# Altium PCB NucciL.PcbDoc
Units mm, origin at the board's own origin, x right, y up, seen from the top; angles counter-clockwise.
Board outline 54 x 54 mm, 2 copper layers (Top Layer, Bottom Layer), stack 1.571 mm thick; 31 components, 23 nets, 79 pads, 10 vias.
Unrouted connection lines stored in the file: 12.
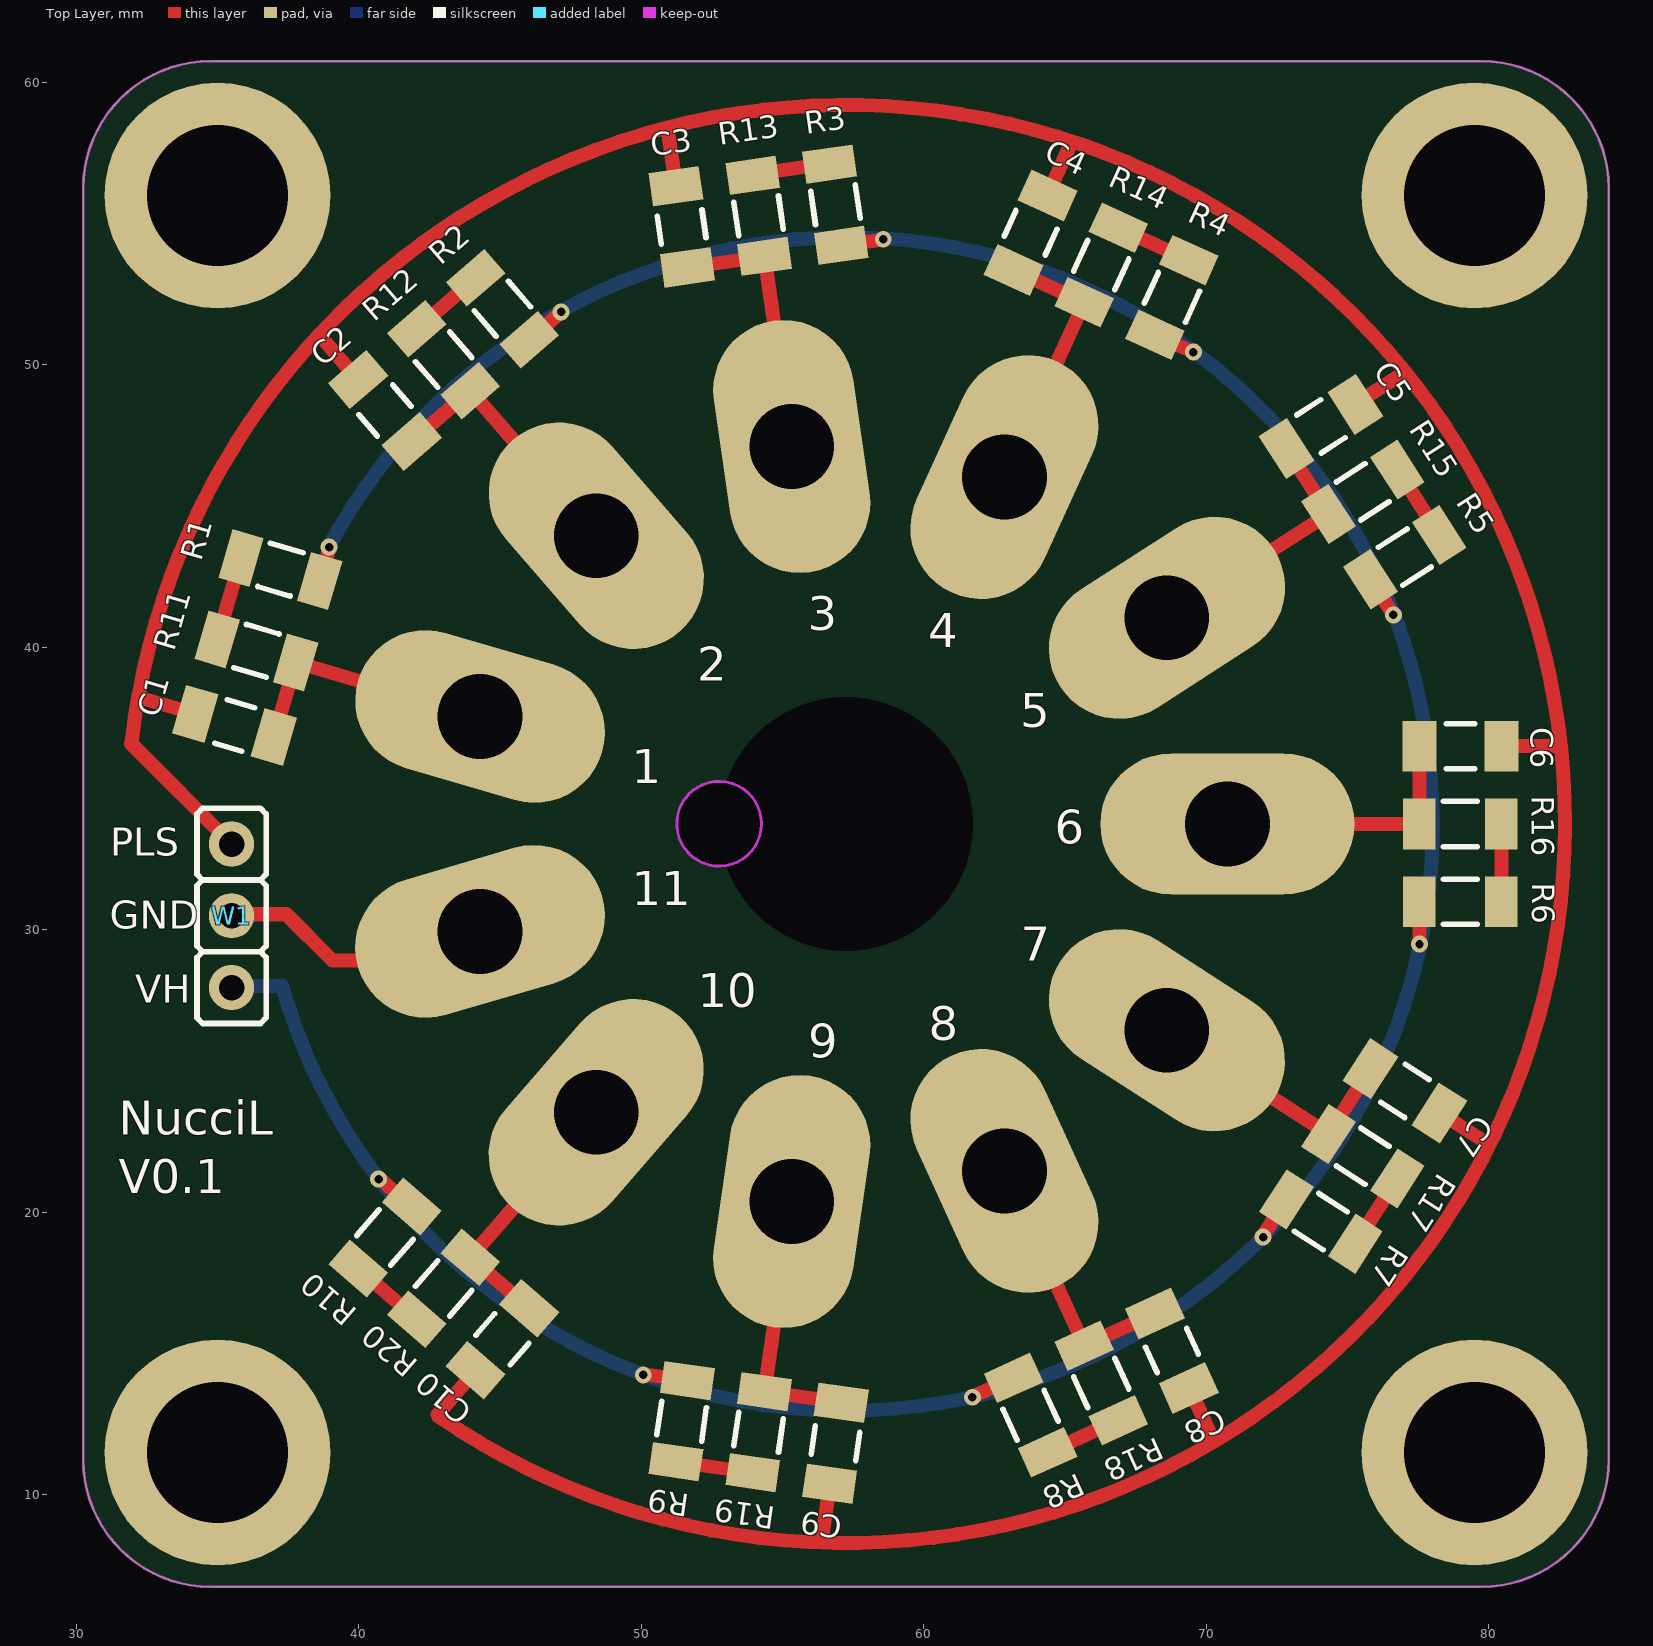
[diagram p0: Top Layer view]
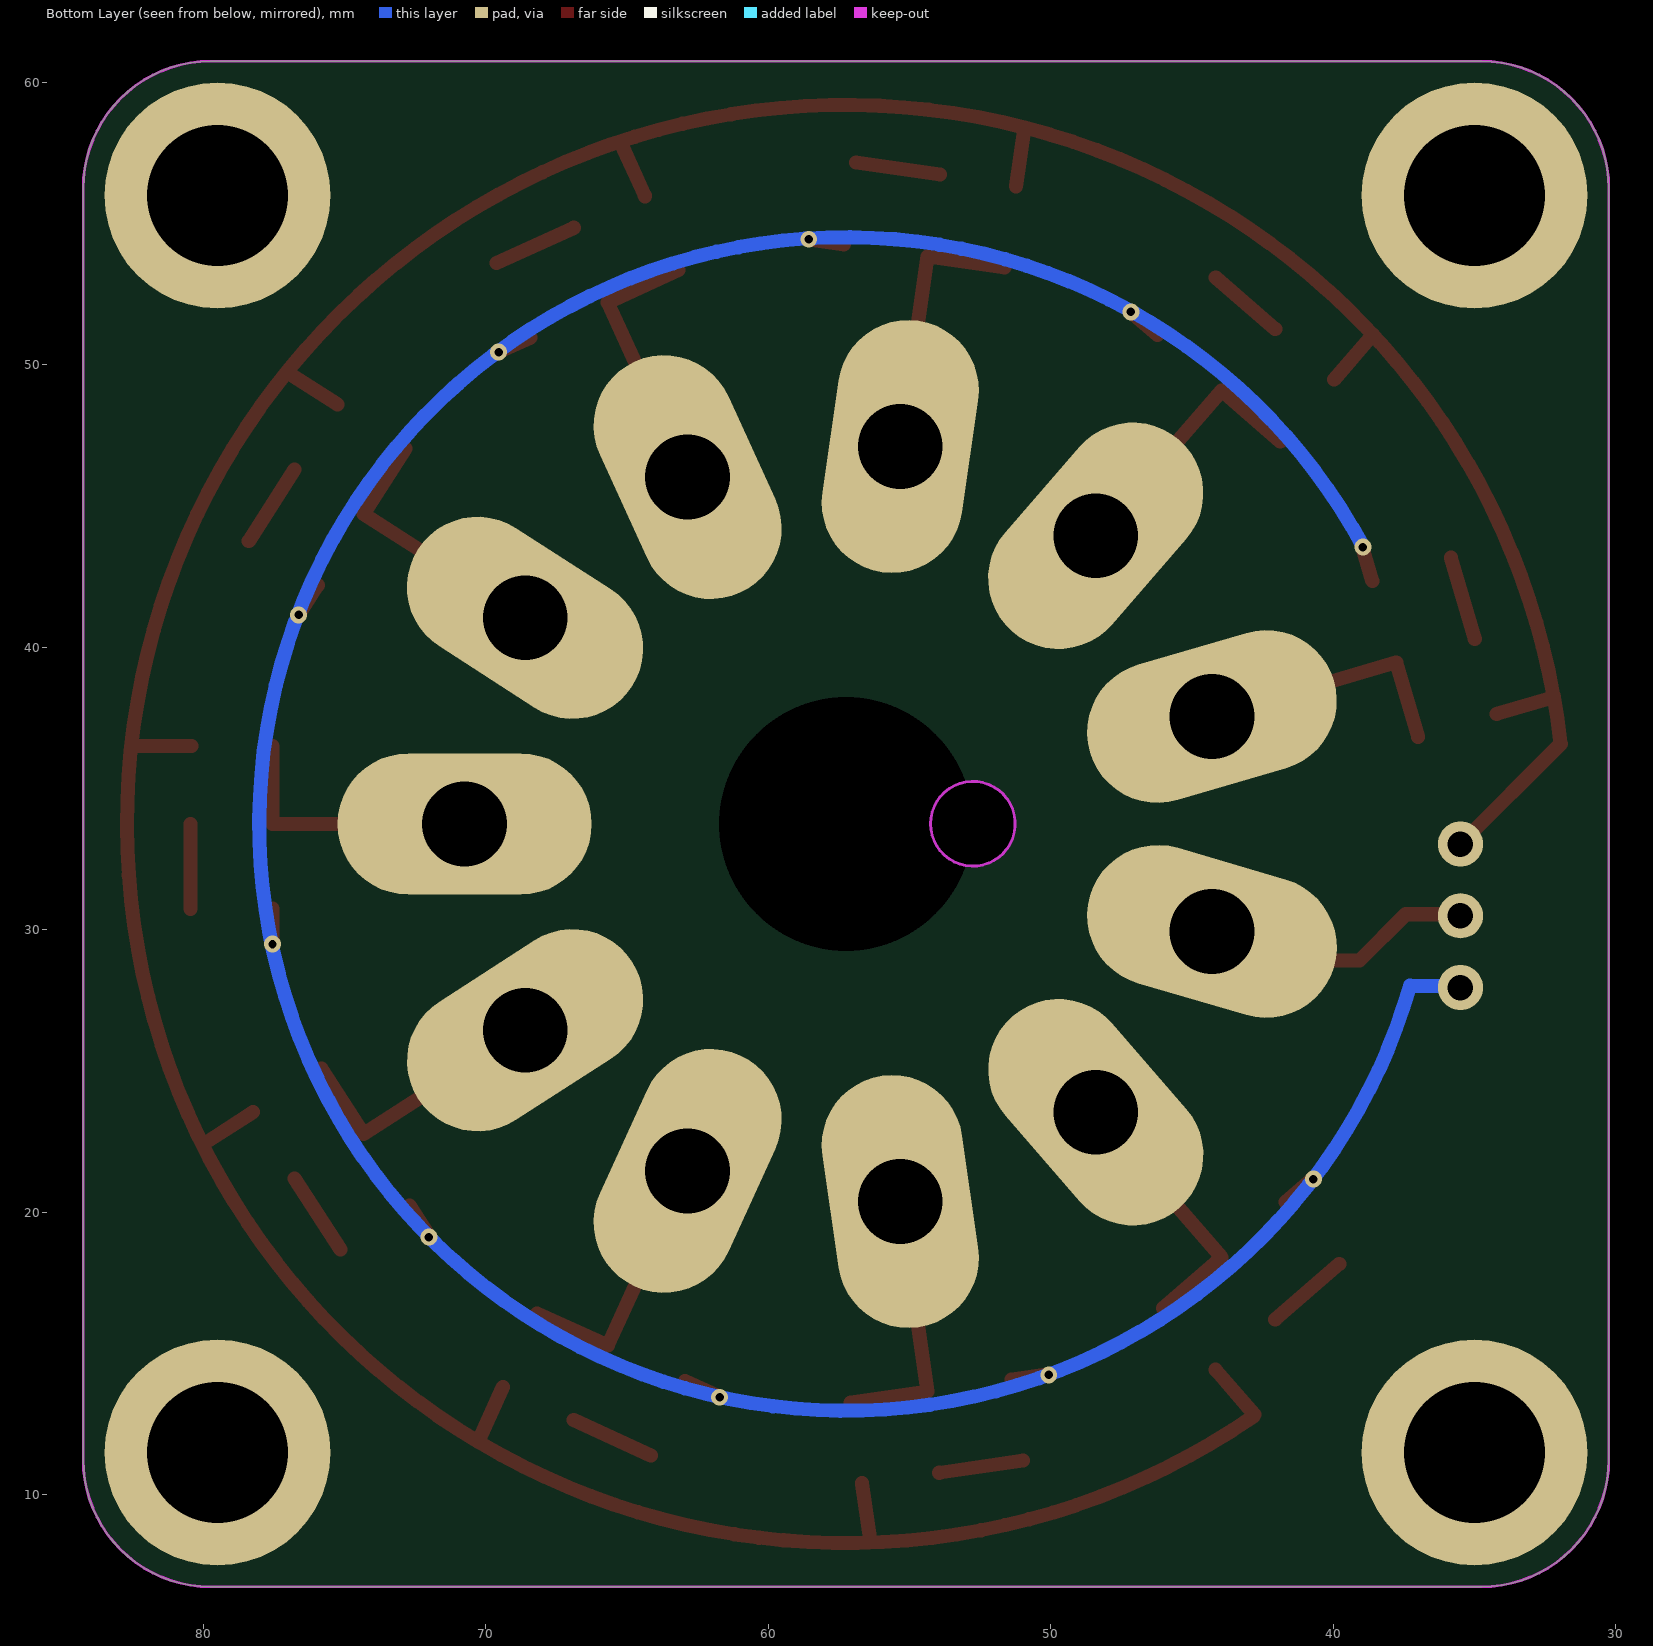
[diagram p1: Bottom Layer view, seen from below]
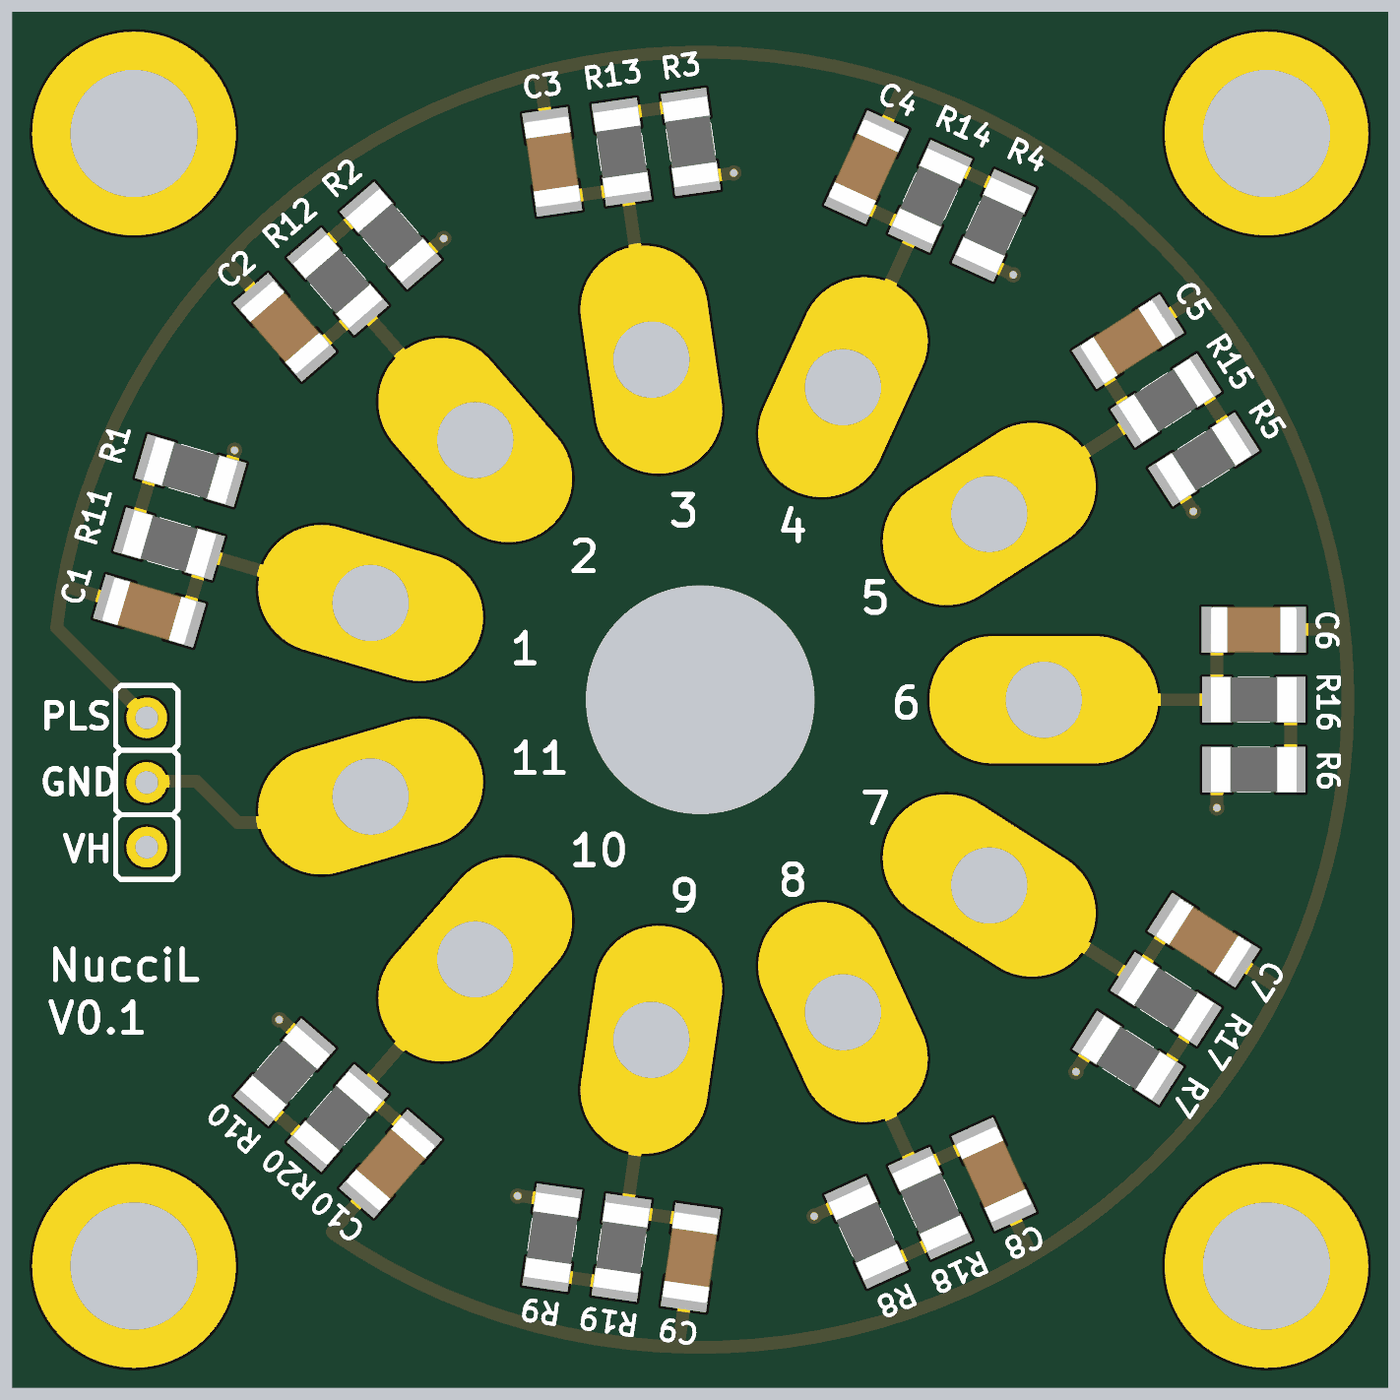
[diagram p2: 3D render of the assembled board from above, using the file's embedded part models]

## Layer stack, top to bottom
Top Solder: solder mask 0.0102, Solder Resist, Dk 3.5
Top Layer: signal copper 0.0356
Dielectric 1: dielectric 1.5, FR-4, Dk 4.8
Bottom Layer: signal copper 0.0356
Bottom Solder: solder mask 0.0102, Solder Resist, Dk 3.5

## Board outline
30.25,11.25 ccw(c34.75,11.25) 34.75,6.75 79.75,6.75 ccw(c79.75,11.25) 84.25,11.25 84.25,56.25 ccw(c79.75,56.25) 79.75,60.75 34.75,60.75 ccw(c34.75,56.25) 30.25,56.25
cut-out: 51.259,33.759 ccw(c52.759,33.759) 52.759,32.259 ccw(c52.759,33.759) 54.259,33.759 ccw(c52.759,33.759) 52.759,35.259 ccw(c52.759,33.759)

## Design rules (kind name [scope] priority, off if disabled: settings)
Clearance [All] p1: gap=0.3 ignorepadtopadclearanceinfootprint=FALSE
HoleSize [All] p1: absolutevalues=TRUE maxlimit=5 minlimit=0.2 maxpercent=80.000 minpercent=20.000
MinimumSolderMaskSliver [All] p1: minsoldermaskwidth=0
PolygonConnect [All] p1: thpad.connectstyle=Relief thpad.reliefconductorwidth=0.25 thpad.reliefentries=4 thpad.polygonreliefangle="90 Angle" thpad.airgapwidth=0.25 smdpad.connectstyle=Relief smdpad.reliefconductorwidth=0.25 smdpad.reliefentries=4 smdpad.polygonreliefangle="90 Angle" smdpad.airgapwidth=0.25 via.connectstyle=Direct via.reliefconductorwidth=0.254 via.reliefentries=4 via.polygonreliefangle="90 Angle" via.airgapwidth=0.254
RoutingVias [All] p1: holewidth=0.3 width=0.7 viastyle="Through Hole" minholewidth=0.3 minwidth=0.3 maxholewidth=1 maxwidth=2
SilkToSilkClearance [All] p1: silktosilkclearance=0.1
SilkToSolderMaskClearance [IsPad] p1: minsilkscreentomaskgap=0.1 clearancetoexposedcopper=TRUE
SolderMaskExpansion [All] p1: expansion=0.102 istentingtop=FALSE
Width [All] p1: maxlimit=2 minlimit=0.2 preferedwidth=0.25
26 further rules are at their usual default settings.

## Components (designator, comment, footprint, x,y, rotation, side; value= is the part's Value field where it differs from the comment)
C1 "10p" CAPC3216X70N 35.606,37.239 r163.64 top
C2 "10p" CAPC3216X70N 40.928,48.387 r130.91 top
C3 "10p" CAPC3216X70N 51.433,54.887 r98.18 top
C4 "10p" CAPC3216X70N 63.784,54.677 r65.45 top
C5 "10p" CAPC3216X70N 74.061,47.823 r32.73 top
C6 "10p" CAPC3216X70N 79,36.5 r0 top
C7 "10p" CAPC3216X70N 77.034,24.305 r327.27 top
C8 "10p" CAPC3216X70N 68.787,15.108 r294.55 top
C9 "10p" CAPC3216X70N 56.877,11.83 r261.82 top
C10 "10p" CAPC3216X70N 45.085,15.512 r229.09 top
R1 "2M4" RESC3216X65N 37.226,42.756 r163.64 top
R2 "2M4" RESC3216X65N 45.085,51.989 r130.91 top
R3 "2M4" RESC3216X65N 56.877,55.67 r98.18 top
R4 "2M4" RESC3216X65N 68.787,52.392 r65.45 top
R5 "2M4" RESC3216X65N 77.034,43.196 r32.73 top
R6 "2M4" RESC3216X65N 79,31 r0 top
R7 "2M4" RESC3216X65N 74.061,19.678 r327.27 top
R8 "2M4" RESC3216X65N 63.784,12.823 r294.55 top
R9 "2M4" RESC3216X65N 51.433,12.613 r261.82 top
R10 "2M4" RESC3216X65N 40.929,19.113 r229.09 top
R11 "2M4" RESC3216X65N 36.381,39.878 r343.64 top
R12 "2M4" RESC3216X65N 43.007,50.188 r310.91 top
R13 "2M4" RESC3216X65N 54.155,55.279 r278.18 top
R14 "2M4" RESC3216X65N 66.285,53.535 r245.45 top
R15 "2M4" RESC3216X65N 75.547,45.509 r212.73 top
R16 "2M4" RESC3216X65N 79,33.75 r180 top
R17 "2M4" RESC3216X65N 75.547,21.991 r147.27 top
R18 "2M4" RESC3216X65N 66.285,13.966 r114.55 top
R19 "2M4" RESC3216X65N 54.155,12.221 r81.82 top
R20 "2M4" RESC3216X65N 43.007,17.312 r49.09 top
W1 "Test Point" COMATEL_385.0358.1.03.400 35.5,27.96 r90 top

## Footprints (in the part's own frame and the unit in brackets; to place one, negate y for a bottom-side part, rotate by r counter-clockwise, add the part's x,y. Pads: shape width x height; smd on the part's side, far side on the other; paste and mask are expansions set on the pad)
CAPC3216X70N [mm] "Chip Capacitor, Body 3.2x1.6mm, IPC Medium Density"
  rect 1.2x1.8 smd: 1(-1.45,0) 2(1.45,0)
  silkscreen extent -0.5,-0.8 0.5,0.8, body extent -1.7,-0.9 1.7,0.9, height 0.7
COMATEL_385.0358.1.03.400 [mm] "3 Contacts Straight Strip Header Pitch 2.54mm L=6.3mm ''Mini-Wire-Wrap''"
  round 1.6 hole 0.9: 1(0,0) 2(2.54,0) 3(5.08,0)
  silkscreen extent -1.27,-1.23 6.35,1.23
RESC3216X65N [mm] "Chip Resistor, EIA 1206, Metric 3216, Body 3.2x1.6mm, IPC Medium Density"
  rect 1.15x1.8 smd: 1(-1.45,0) 2(1.45,0)
  silkscreen extent -0.6,-0.8 0.6,0.8, body extent -1.67,-0.87 1.68,0.88, height 0.65

## Part data
C1 C2 C3 C4 C5 C6 C7 C8 C9 C10: library part CC1206_10PF_500V_5%_NP0, "Non-polarised capacitor", Case=1206, Manufacturer=GENERIC, Manufacturer1 ComponentHeight=0.7mm, Manufacturer1 Example=YAGEO, Manufacturer1 Part Number=CC1206JRNPOBBN100, Tolerance=±5%, Voltage=500V, Author="CERN DEM JLC", Component Type=Standard, CreateDate=10/25/2011, HelpURL=\\cern.ch\dfs\Applications\Altium\Datasheets\CC1206_YAGEO_MID-VOLTAGE.pdf, LatestRevisionDate=10/25/2011, Manufacturer Part Number=CC1206_10PF_500V_5%_NP0, Mounted=Yes, Part Description="SMD Multilayer Chip Ceramic Capacitor", Part Number=CC1206_10PF_500V_5%_NP0, Pin Count=2, SMD=Yes, Socket=No, Status=None, TC=NP0
R1 R2 R3 R4 R5 R6 R7 R8 R9 R10 R11 R12 R13 R14 R15 R16 R17 R18 R19 R20: library part R1206_2M4_1%_0.25W_100PPM, "Resistor - 1%", Case=1206, Manufacturer=GENERIC, Manufacturer1 ComponentHeight=0.55mm, Manufacturer1 Example=Vishay, Manufacturer1 Part Number=CRCW12062M40FKEA, Power=0.25W, Tolerance=±1%, Author=DEL, Component Type=Standard, CreateDate=6/3/2025, LatestRevisionDate=6/3/2025, Manufacturer Part Number=R1206_2M4_1%_0.25W_100PPM, Mounted=Yes, Part Description="General Purpose Thick Film Chip Resistor", Part Number=R1206_2M4_1%_0.25W_100PPM, Pin Count=2, SMD=Yes, Socket=No, Status=Preferred, TC=±100ppm/°C
W1: library part COMATEL_385.0358.1.03.400, "3 Mini Wire-Wrap Contact Strip Header", Manufacturer="KONTEK COMATEL", Manufacturer Part Number=385.0358.1.03.400, Author="CERN DEM JLC", Component Type=Standard, ComponentHeight=8mm, CreateDate=6/30/2010, Family="Test Point", HelpURL=\\cern.ch\dfs\Applications\Altium\Datasheets\COMATEL_385.0358.1.03.400.pdf, LatestRevisionDate=6/30/2010, Mounted=Yes, Part Description="3 Contacts Straight Strip Header Pitch 2.54mm L=6.3mm ''Mini-Wire-Wrap''", Part Number=COMATEL_385.0358.1.03.400, Pin Count=3, SMD=No, Socket=No, Status=None

## Free pads (board coordinates)
  oval 9x5 hole 3 rot 163.63: 1(44.297,37.554)
  oval 9x5 hole 3 rot 130.91: 2(48.41,43.953)
  oval 9x5 hole 3 rot 98.18: 3(55.329,47.113)
  oval 9x5 hole 3 rot 65.45: 4(62.858,46.03)
  oval 9x5 hole 3 rot 32.73: 5(68.607,41.049)
  oval 9x5 hole 3: 6(70.75,33.75)
  oval 9x5 hole 3 rot 147.27: 7(68.607,26.451)
  oval 9x5 hole 3 rot 114.54: 8(62.858,21.47)
  oval 9x5 hole 3 rot 81.82: 9(55.328,20.388)
  oval 9x5 hole 3 rot 49.09: 10(48.409,23.548)
  oval 9x5 hole 3 rot 16.36: 11(44.297,29.947)
  round 8 hole 9 unplated: 18(57.25,33.75)
  round 8 hole 5 unplated: MH1(35,56) MH2(35,11.5) MH3(79.5,56) MH4(79.5,11.5)

## Via types
v1: diameter 0.6, hole 0.3, Top Layer to Bottom Layer, tented both sides, 10 vias

## Nets (pads, with @x,y where several pads share a name; then routed paths per layer and width w, separated by ;. In a path a pad name is that pad's centre, name@x,y a point inside that pad or via, vN(x,y) a via of type N, cw(c..) or ccw(c..) an arc to the next point about the centre after c; other vN are vias at no path point)
A1: C1.1 pad.1 R11.2 | length 5.7
  Top Layer w0.5: C1.1 R11.2 pad.1@40.651,38.624
A2: C2.1 pad.2 R12.2 | length 5.7
  Top Layer w0.5: C2.1 R12.2 pad.2@45.921,46.825
A3: C3.1 pad.3 R13.2 | length 5.7
  Top Layer w0.5: C3.1 R13.2 ; R13.2 pad.3@54.788,50.874
A4: C4.1 pad.4 R14.2 | length 5.8
  Top Layer w0.5: C4.1 R14.2 pad.4@64.437,49.487
A5: C5.1 pad.5 R15.2 | length 5.8
  Top Layer w0.5: pad.5@71.804,43.103 R15.2 C5.1
A6: C6.1 pad.6 R16.2 | length 5.8
  Top Layer w0.5: pad.6@74.55,33.75 R16.2 C6.1
A7: C7.1 pad.7 R17.2 | length 5.7
  Top Layer w0.5: pad.7@71.804,24.397 R17.2 C7.1
A8: C8.1 pad.8 R18.2 | length 5.8
  Top Layer w0.5: pad.8@64.437,18.013 65.683,15.284 C8.1
A9: C9.1 pad.9 R19.2 | length 5.8
  Top Layer w0.5: pad.9@54.788,16.626 R19.2 C9.1
A10: C10.1 pad.10 R20.2 | length 5.8
  Top Layer w0.5: pad.10@45.921,20.675 R20.2 C10.1
GND: pad.11 W1.2 | length 9.9
  Top Layer w0.5: W1.2@35.531,30.554 37.434,30.554 39.07,28.919 43.29,28.919 pad.11@44.309,29.938
NetR1_2: R1.2 R11.1 | length 3
  Top Layer w0.5: R11.1@34.995,40.306 R1.2@35.84,43.185
NetR2_2: R2.2 R12.1 | length 2.8
  Top Layer w0.5: R12.1@42.056,51.268 42.064,51.275 44.143,53.076 R2.2@44.16,53.091
NetR3_2: R3.2 R13.1 | length 3
  Top Layer w0.5: R13.1@53.917,56.74 R3.2@56.887,57.167
NetR4_2: R4.2 R14.1 | length 3
  Top Layer w0.5: R14.1 R4.2@69.617,53.607
NetR5_2: R5.2 R15.1 | length 3
  Top Layer w0.5: R15.1 R5.2@78.389,43.769
NetR6_2: R6.2 R16.1 | length 3
  Top Layer w0.5: R6.2@80.45,30.75 R16.1
NetR7_2: R7.2 R17.1 | length 3
  Top Layer w0.5: R7.2@75.145,18.683 R17.1
NetR8_2: R8.2 R18.1 | length 3
  Top Layer w0.5: R8.2@64.159,11.4 R18.1
NetR9_2: R9.2 R19.1 | length 3
  Top Layer w0.5: R9.2@50.979,11.213 R19.1@53.948,10.786
NetR10_2: R10.2 R20.1 | length 3
  Top Layer w0.5: R10.2@39.79,18.181 R20.1
PULSE: C1.2 C2.2 C3.2 C4.2 C5.2 C6.2 C7.2 C8.2 C9.2 C10.2 W1.3 | length 158.5
  Top Layer w0.5: 31.948,36.592 W1.3 ; 31.958,36.587 cw(c57.25,33.75) 42.835,12.775 ; 32.198,38.24 C1.2 ; 38.602,51.071 C2.2 ; 42.791,12.842 44.147,14.406 C10.2@44.168,14.431 ; 50.927,58.403 C3.2 ; 56.39,8.344 56.685,10.393 C9.2@56.69,10.425 ; C4.2@64.359,55.973 64.373,56.002 65.233,57.885 ; C8.2@69.389,13.824 69.403,13.795 70.262,11.913 ; C5.2@75.245,48.601 75.272,48.619 77.013,49.738 ; C7.2@78.235,23.551 78.262,23.533 80.003,22.414 ; C6.2@80.418,36.515 82.52,36.515
VH: R1.1 R2.1 R3.1 R4.1 R5.1 R6.1 R7.1 R8.1 R9.1 R10.1 W1.1 | length 128.7
  Top Layer w0.5: R1.1 v1@38.97,43.547 ; v1@40.744,21.191 R10.1@41.689,20.373 ; R2.1@46.223,51.056 v1(47.168,51.875) ; v1@50.154,14.261 R9.1@51.392,14.083 ; R3.1@57.33,54.271 v1(58.568,54.448) ; v1@61.817,13.519 R8.1@62.954,14.038 ; R4.1@68.412,50.97 v1(69.549,50.45) ; v1@72.03,19.2 R7.1@72.706,20.251 ; R5.1@75.95,42.202 v1(76.625,41.15) ; v1(77.55,29.5) R6.1@77.55,30.75
  Bottom Layer w0.5: W1.1@35.487,28.014 37.237,28.014 ; 37.285,28.025 ccw(c57.25,33.75) v1@38.945,43.565
  other v1: 61.726,13.458 50.074,14.251 72.016,19.128 40.705,21.177 38.95,43.553

## Keep-outs
Keep-Out Layer:
  circle w0.1: c52.759,33.759 r1.5
  lines w0.1: 30.25,11.25 ccw(c34.75,11.25) 34.75,6.75 79.75,6.75 ccw(c79.75,11.25) 84.25,11.25 84.25,56.25 ccw(c79.75,56.25) 79.75,60.75 34.75,60.75 ccw(c34.75,56.25) 30.25,56.25 30.25,11.25

## Silkscreen, mask and mechanical layers (free items; w line width, h text height)
Top Overlay:
  text "3" at 55.904,40.607 h1.2
  text "4" at 60.167,39.999 h1.2
  text "2" at 51.989,38.814 h1.2
  text "5" at 63.425,37.182 h1.2
  text "1" at 49.664,35.188 h1.2
  text "6" at 64.643,33.051 h1.2
  text "PLS" at 31.21,32.627 h1
  text "11" at 49.669,30.882 h1.2
  text "GND" at 31.191,30.035 h1
  text "7" at 63.434,28.918 h1.2
  text "VH" at 32.087,27.417 h1
  text "10" at 52.001,27.261 h1.2
  text "8" at 60.183,26.094 h1.2
  text "9" at 55.921,25.476 h1.2
  text "NucciL" at 31.5,22.75 h1.2
  text "V0.1" at 31.5,20.675 h1.2
Mechanical 13:
  lines w0.254: 76.742,34.691 ccw(c57.25,33.75) 76.764,33.75

## Dimensions
79.75,6.75 to 79.75,60.75 on Mechanical 13
79.5,11.5 to 79.5,56 on Mechanical 13